# EAGLE board BareBonesArduino (EAGLE 6.5.0)

No outline drawn. Coordinates in mm, seen from the top.
Copper layers (1*16): Top 0.035mm / dielectric 1.5mm / Bottom 0.035mm
Design rules "default": minimum track width 10mil, minimum drill 24mil, track to track 8mil, track to pad 8mil, pad to pad 8mil, via to via 8mil, smd to smd 8mil, copper to edge 40mil, drill to drill 8mil, minimum pad ring 10mil, minimum via ring 8mil, stop-mask expansion 4mil, vias tented up to drill 0mil, thermal gap 10mil

## Footprints (pad centres in the part's own frame; a part is rotated, then mirrored left to right if it is on the bottom)
CAP-PTH-SMALL = drill 0.7 pad 1.651: 1 0,0; 2 2.54,0
POWER_JACK_PTH = drill 2.997 pad 4.318: GND 0,7.7; GNDBREAK 4.7,10.7; PWR 0,13.7
2X3 = drill 1.016 pad 1.88 octagon: 1 0,0; 2 0,2.54; 3 2.54,0; 4 2.54,2.54; 5 5.08,0; 6 5.08,2.54
1X08 = drill 1.016 pad 1.88 square: 1 0,0 | drill 1.016 pad 1.88: 2 2.54,0; 3 5.08,0; 4 7.62,0; 5 10.16,0; 6 12.7,0; 7 15.24,0; 8 17.78,0
1X06 = drill 1.016 pad 1.88: 1 0,0; 2 2.54,0; 3 5.08,0; 4 7.62,0; 5 10.16,0; 6 12.7,0
LED5MM = drill 0.813 pad 1.88: A -1.27,0; K 1.27,0
AXIAL-0.4 = drill 0.9 pad 1.88: P$1 -5.08,0; P$2 5.08,0
DIL28-3 = drill 0.813 long: 1 -16.51,-3.81; 2 -13.97,-3.81; 3 -11.43,-3.81; 4 -8.89,-3.81; 5 -6.35,-3.81; 6 -3.81,-3.81; 7 -1.27,-3.81; 8 1.27,-3.81; 9 3.81,-3.81; 10 6.35,-3.81; 11 8.89,-3.81; 12 11.43,-3.81; 13 13.97,-3.81; 14 16.51,-3.81; 15 16.51,3.81; 16 13.97,3.81; 17 11.43,3.81; 18 8.89,3.81; 19 6.35,3.81; 20 3.81,3.81; 21 1.27,3.81; 22 -1.27,3.81; 23 -3.81,3.81; 24 -6.35,3.81; 25 -8.89,3.81; 26 -11.43,3.81; 27 -13.97,3.81; 28 -16.51,3.81

## Placement (x,y rotation side)
C1  [CAP-PTH-SMALL]  62.23,58.42 270 top
C2  [CAP-PTH-SMALL]  62.23,60.96 180 top
FRAME1  FRAME-LETTER  [CREATIVE_COMMONS]  -77.47,29.21 0 top
J1  POWER_JACKPTH  [POWER_JACK_PTH]  50.8,73.66 270 top
J2  AVR_SPI_PRG_6PTH  [2X3]  69.85,29.21 0 top
JP1  [1X08]  91.44,57.15 90 top
JP2  [1X06]  62.23,52.07 270 top
LED1  [LED5MM]  83.82,34.29 0 top
LED2  [LED5MM]  83.82,44.45 0 top
LED3  [LED5MM]  83.82,54.61 0 top
R1  [AXIAL-0.4]  60.96,64.77 0 top
R5  [AXIAL-0.4]  83.82,49.53 0 top
R6  [AXIAL-0.4]  83.82,39.37 180 top
R7  [AXIAL-0.4]  83.82,29.21 180 top
U1  ATMEGA328P_PDIP  [DIL28-3]  72.39,54.61 270 top

## Library data of the parts
C1 C2 = SparkFun-Capacitors
FRAME1 = SparkFun-Aesthetics
J1 = SparkFun-Connectors; PROD_ID: PRT-00119
J2 JP1 JP2 = SparkFun-Connectors
LED1-LED3 = SparkFun-LED
R1 R5-R7 = SparkFun-Resistors
U1 = SparkFun-DigitalIC

## Nets
CTS: JP2.5
DTR: C2.1 JP2.1
GND: C1.2 J1.GND J1.GNDBREAK J2.6 JP1.8 JP2.6 R5.P$1 R6.P$1 R7.P$1 U1.8 U1.22
MISO: J2.1 U1.18
MOSI: J2.4 LED3.K U1.16 U1.17
N$1: JP1.4 U1.25
N$2: LED2.A R6.P$2
N$5: JP1.2 U1.23
N$6: JP1.3 U1.24
N$8: JP1.5 U1.26
N$9: JP1.7 U1.28
N$10: JP1.6 U1.27
N$12: LED2.K U1.15
N$13: LED1.K U1.14
N$14: LED3.A R5.P$2
N$16: LED1.A R7.P$2
RESET: C2.2 J2.5 R1.P$1 U1.1
RX: JP2.3
SCK: J2.3 U1.19
TX: JP2.2 U1.3
VCC: C1.1 J1.PWR J2.2 JP1.1 JP2.4 R1.P$2 U1.7 U1.20

## Tracks (layer width: path | path; a pad name or v marks a point on that pad's centre or on a via)
DTR  (1 unrouted)
GND  (10 unrouted)
MISO  (1 unrouted)
MOSI  (3 unrouted)
N$1  (1 unrouted)
N$2  (1 unrouted)
N$5  (1 unrouted)
N$6  (1 unrouted)
N$8  (1 unrouted)
N$9  (1 unrouted)
N$10  (1 unrouted)
N$12  (1 unrouted)
N$13  (1 unrouted)
N$14  (1 unrouted)
N$16  (1 unrouted)
RESET  (3 unrouted)
SCK  (1 unrouted)
TX  (1 unrouted)
VCC  (7 unrouted)

## Text on the board
_tNames: J1 | U1 | R1 | C2 | C1 | JP1 | LED3 | JP2 | R5 | LED2 | R6 | J2 | LED1 | R7